# Altium PCB Adjustable Led Driver on LM-317 (6 ports) compact.PcbDoc
Units mm, origin at the board's own origin, x right, y up, seen from the top; angles counter-clockwise.
Board outline 152.4 x 101.6 mm, 2 copper layers (Top Layer, Bottom Layer); 13 components, 16 nets, 40 pads, 11 vias.
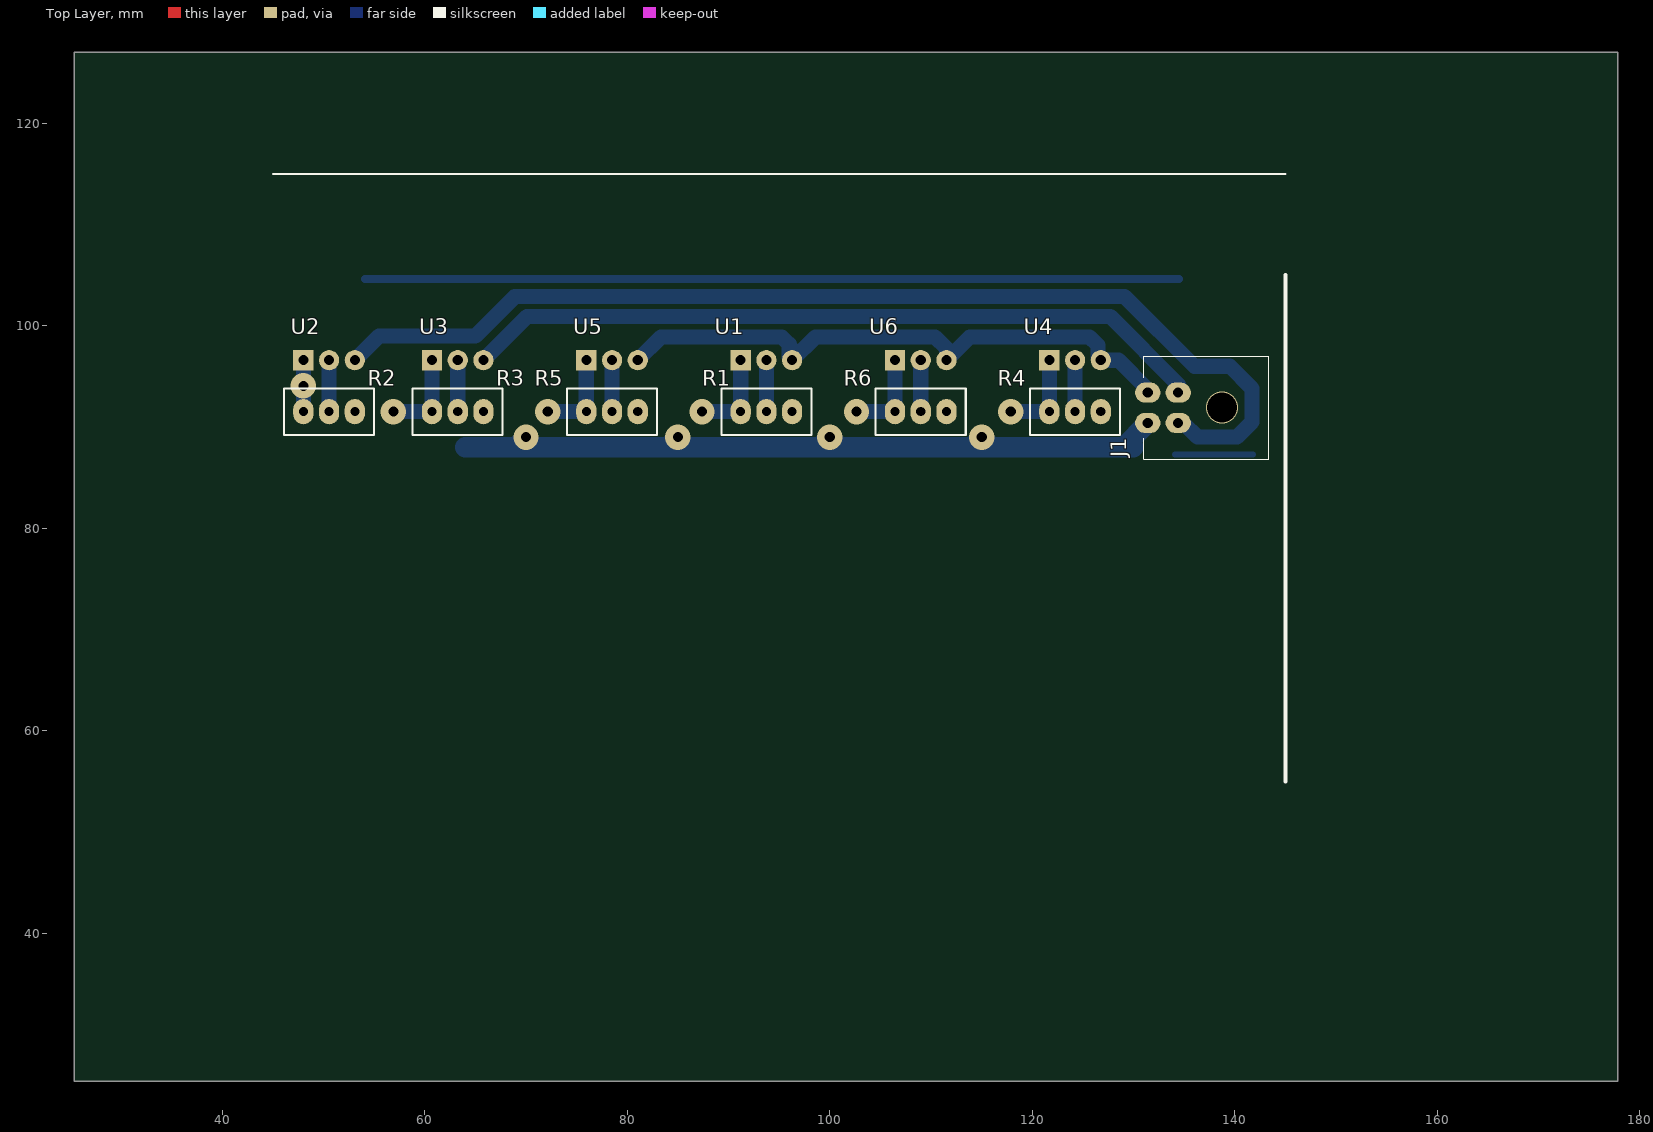
[diagram p0: Top Layer view]
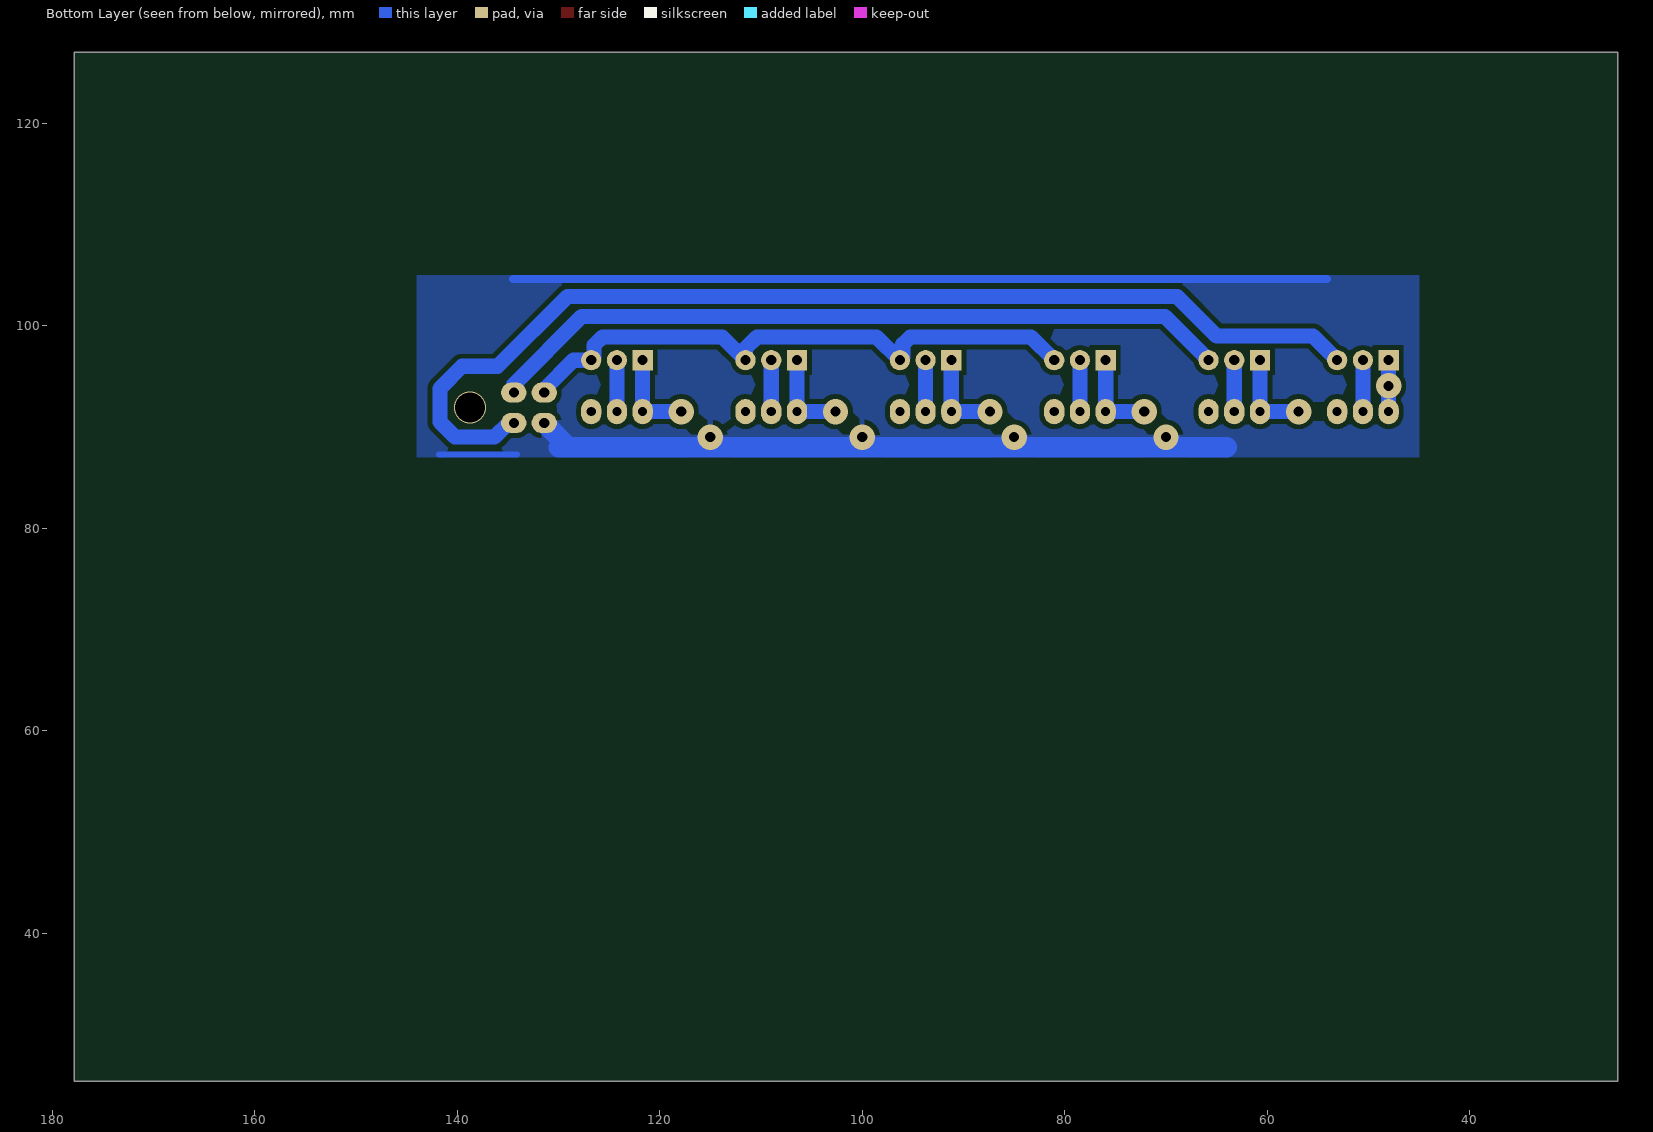
[diagram p1: Bottom Layer view, seen from below]
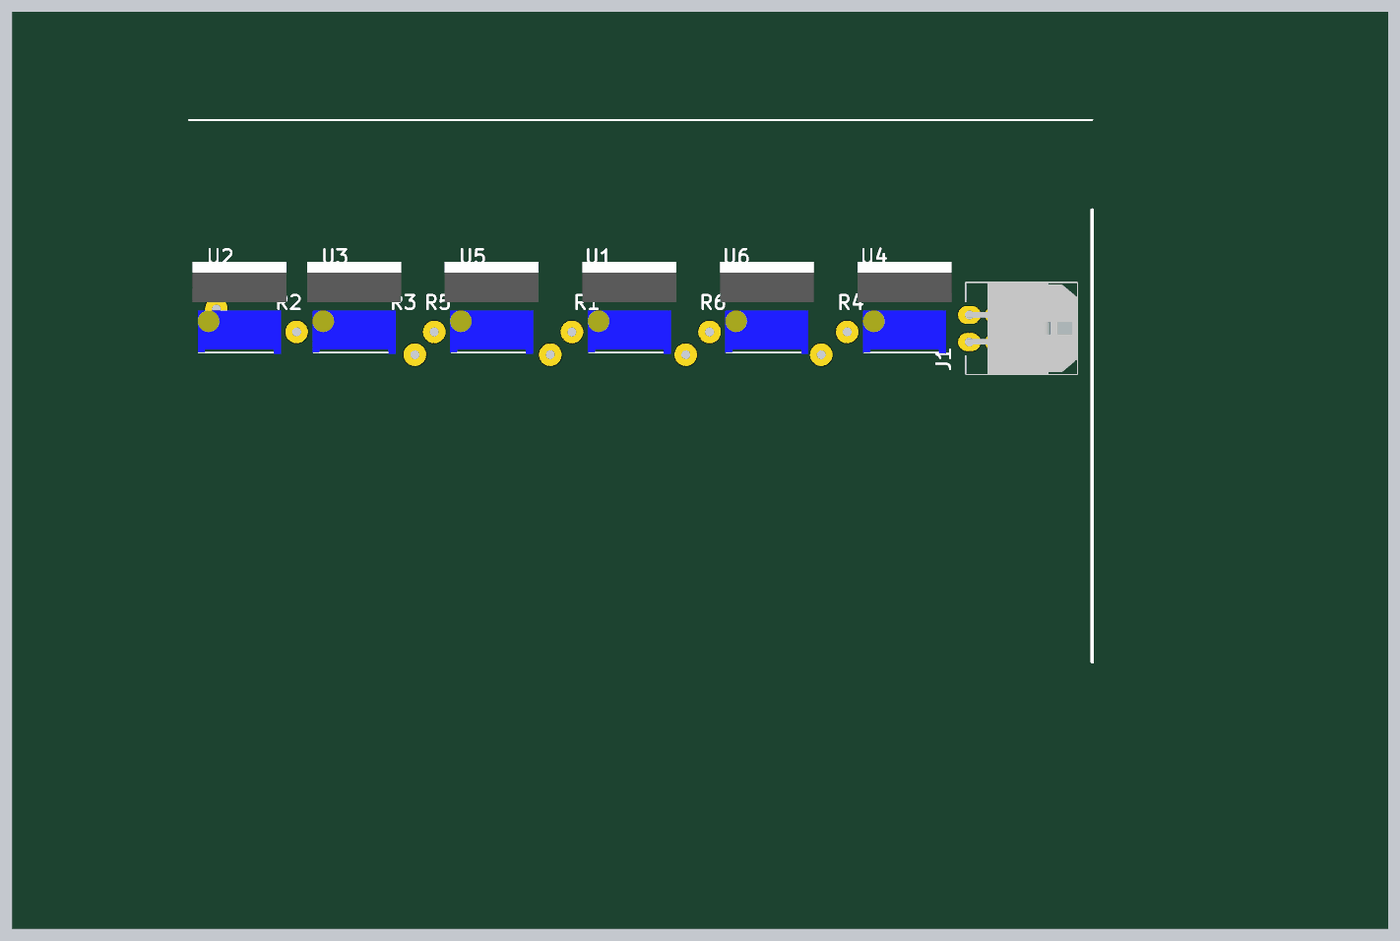
[diagram p2: 3D render of the assembled board from above, using the file's embedded part models]

## Layer stack, top to bottom
Top Solder: solder mask 0.0102, Solder Resist, Dk 3.5
Top Layer: signal copper 0.0356
Dielectric 1: dielectric 0.32, FR-4, Dk 4.8
Bottom Layer: signal copper 0.0356
Bottom Solder: solder mask 0.0102, Solder Resist, Dk 3.5

## Board outline
25.4,25.4 177.8,25.4 177.8,127 25.4,127

## Design rules (kind name [scope] priority, off if disabled: settings)
Clearance [All] p1: gap=0.5
PlaneConnect [All] p1: planeconnectstyle=Relief reliefexpansion=0.508 reliefentries=4 reliefconductorwidth=0.5 reliefairgap=0.5
PolygonConnect [All] p1: connectstyle=Relief reliefconductorwidth=0.5 reliefentries=4 polygonreliefangle="90 Angle" airgapwidth=0.5
RoutingVias [All] p1: holewidth=0.711 width=1.27 viastyle="Through Hole" minholewidth=0.711 minwidth=1.27 maxholewidth=0.711 maxwidth=1.27
SolderMaskExpansion [All] p1: expansion=0.102
Width [All] p1: maxlimit=3 minlimit=0.6 preferedwidth=1.5
28 further rules are at their usual default settings.

## Components (designator, comment, footprint, x,y, rotation, side; value= is the part's Value field where it differs from the comment)
J1 "Input" "Molex Micro-Fit 3.0 - 4 pin D R" 134.4,93.4 r90 top
R1 "КOm" "Res Adj 2.54 X 3" 96.28,91.52 r270 top
R2 "КOm" "Res Adj 2.54 X 3" 53.1,91.52 r270 top
R3 "КOm" "Res Adj 2.54 X 3" 65.8,91.52 r270 top
R4 "КOm" "Res Adj 2.54 X 3" 126.76,91.52 r270 top
R5 "КOm" "Res Adj 2.54 X 3" 81.04,91.52 r270 top
R6 "КOm" "Res Adj 2.54 X 3" 111.52,91.52 r270 top
U1 "" TO220-2 91.2,96.6 r270 top
U2 "" TO220-2 48.02,96.6 r270 top
U3 "" TO220-2 60.72,96.6 r270 top
U4 "" TO220-2 121.68,96.6 r270 top
U5 "" TO220-2 75.96,96.6 r270 top
U6 "" TO220-2 106.44,96.6 r270 top

## Footprints (in the part's own frame and the unit in brackets; to place one, negate y for a bottom-side part, rotate by r counter-clockwise, add the part's x,y. Pads: shape width x height; smd on the part's side, far side on the other; paste and mask are expansions set on the pad)
"Molex Micro-Fit 3.0 - 4 pin D R" [mm]
  oval 2x2.5 hole 1: 1(0,0) 2(-3,0) 3(0,3) 4(-3,3)
  silkscreen extent -6.58,-8.95 3.6,3.4, body extent -6.55,-8.94 3.6,3.3, height 8.83
"Res Adj 2.54 X 3" [mm]
  oval 2.5x2 hole 0.9: 1(0,0) 2(0,-2.54) 3(0,-5.08)
  silkscreen extent -2.29,-6.98 2.29,1.91, body extent -2.39,-7.14 2.41,2.06, height 12.06
TO220-2 [mm]
  rect 2x2 hole 1: 1(0,0)
  round 2 hole 1: 2(0,2.54) 3(0,5.08)
  body extent -2.7,-2.65 1.8,7.75, height 19

## Part data
J1: library part "Micro-Fit 4R (2x2)", "Horisontal, Dbl line, Male - 3mm"
R1 R2 R3 R4 R5 R6: library part "Res Adj 3296"
U1 U2 U3 U4 U5 U6: library part LM-317, "Voltage Regulator"

## Via types
v1: diameter 2.5, hole 1, Top Layer to Bottom Layer, 10 vias
v2: diameter 3.2, hole 3, Top Layer to Bottom Layer, 1 vias

## Nets (pads, with @x,y where several pads share a name; then routed paths per layer and width w, separated by ;. In a path a pad name is that pad's centre, name@x,y a point inside that pad or via, vN(x,y) a via of type N, cw(c..) or ccw(c..) an arc to the next point about the centre after c; other vN are vias at no path point)
GND: J1.4 | length 223
  Bottom Layer w0.6: 134.1,87.3 141.8,87.3
  Bottom Layer w0.8: 54.1,104.6 134.5,104.6
  Bottom Layer w2: 64,88 130,88 ; 65,88 69,88 v1(70,89) ; 71,88 84,88 v1(85,89) ; v1@85,88 99,88 v1(100,89) 101,88 114,88 v1(115,89) 116,88 129,88 J1.4
NetR1_2: R1.2 U1.2 | length 5.1
  Bottom Layer w1.5: R1.2 U1.2
NetR2_2: R2.2 U2.2 | length 5.1
  Bottom Layer w1.5: R2.2 U2.2
NetR3_2: R3.2 U3.2 | length 5.1
  Bottom Layer w1.5: R3.2 U3.2
NetR4_2: R4.2 U4.2 | length 5.1
  Bottom Layer w1.5: R4.2 U4.2
NetR5_2: R5.2 U5.2 | length 5.1
  Bottom Layer w1.5: R5.2 U5.2
NetR6_2: R6.2 U6.2 | length 5.1
  Bottom Layer w1.5: R6.2 U6.2
STOPSIGNAL_IN: J1.3 U1.3 U4.3 U5.3 U6.3 | length 59.7
  Bottom Layer w1.5: U5.3 83.34,98.9 95.26,98.9 95.99,98.17 95.99,96.89 U1.3 98.58,98.9 110.4,98.9 111.52,97.78 U6.3 113.82,98.9 125.64,98.9 126.47,98.07 126.47,96.89 U4.3 128.5,96.6 131.4,93.7 J1.3
"STOPSIGNAL_OUT 1": R1.3 U1.1 | length 8.9
  Bottom Layer w1.5: v1(87.39,91.52) R1.3 U1.1
"STOPSIGNAL_OUT 2": R4.3 U4.1 | length 8.9
  Bottom Layer w1.5: v1(117.87,91.52) R4.3 U4.1
"STOPSIGNAL_OUT 3": R5.3 U5.1 | length 8.9
  Bottom Layer w1.5: v1(72.15,91.52) R5.3 U5.1
"STOPSIGNAL_OUT 4": R6.3 U6.1 | length 8.9
  Bottom Layer w1.5: v1(102.63,91.52) R6.3 U6.1
TURNLEFT_IN: J1.1 U3.3 | length 74
  Bottom Layer w1.5: U3.3 70.1,100.9 127.7,100.9 134.4,94.2 J1.1
TURNLEFT_OUT: R3.3 U3.1 | length 8.9
  Bottom Layer w1.5: v1(56.91,91.52) R3.3 U3.1
TURNRIGHT_IN: J1.2 U2.3 | length 106.8
  Bottom Layer w1.5: U2.3 55.5,99 65,99 68.9,102.9 129.1,102.9 136,96 139.5,96 141.7,93.8 141.7,90.5 140.2,89 136.3,89 134.9,90.4 J1.2
TURNRIGHT_OUT: R2.3 U2.1 | length 5.1
  Bottom Layer w1.5: R2.3 U2.1
  other v1: 48.02,94.06
pads on no net: R1.1 R2.1 R3.1 R4.1 R5.1 R6.1
copper on no net:
  other v2: 138.725,91.925

## Polygon pours and split planes (outlines as drawn)
GND on Bottom Layer "Top Layer-No Net" (solid, pour order 4): 45,105 45,87 144,87 144,105

## Silkscreen, mask and mechanical layers (free items; w line width, h text height)
Top Overlay:
  lines w0.2: 45,115 145,115
  lines w0.4: 145,55 145,105